# Altium PCB corePCB1nohighfreq.PcbDoc (part 3 of 3)
Units mil, origin at the board's own origin, x right, y up, seen from the top; angles counter-clockwise.
Board outline 3543.31 x 3543.31 mil, 4 copper layers (Top Layer, Layer 1, Layer 2, Bottom Layer), stack 23.756 mil thick; 90 components, 166 nets, 640 pads, 463 vias.
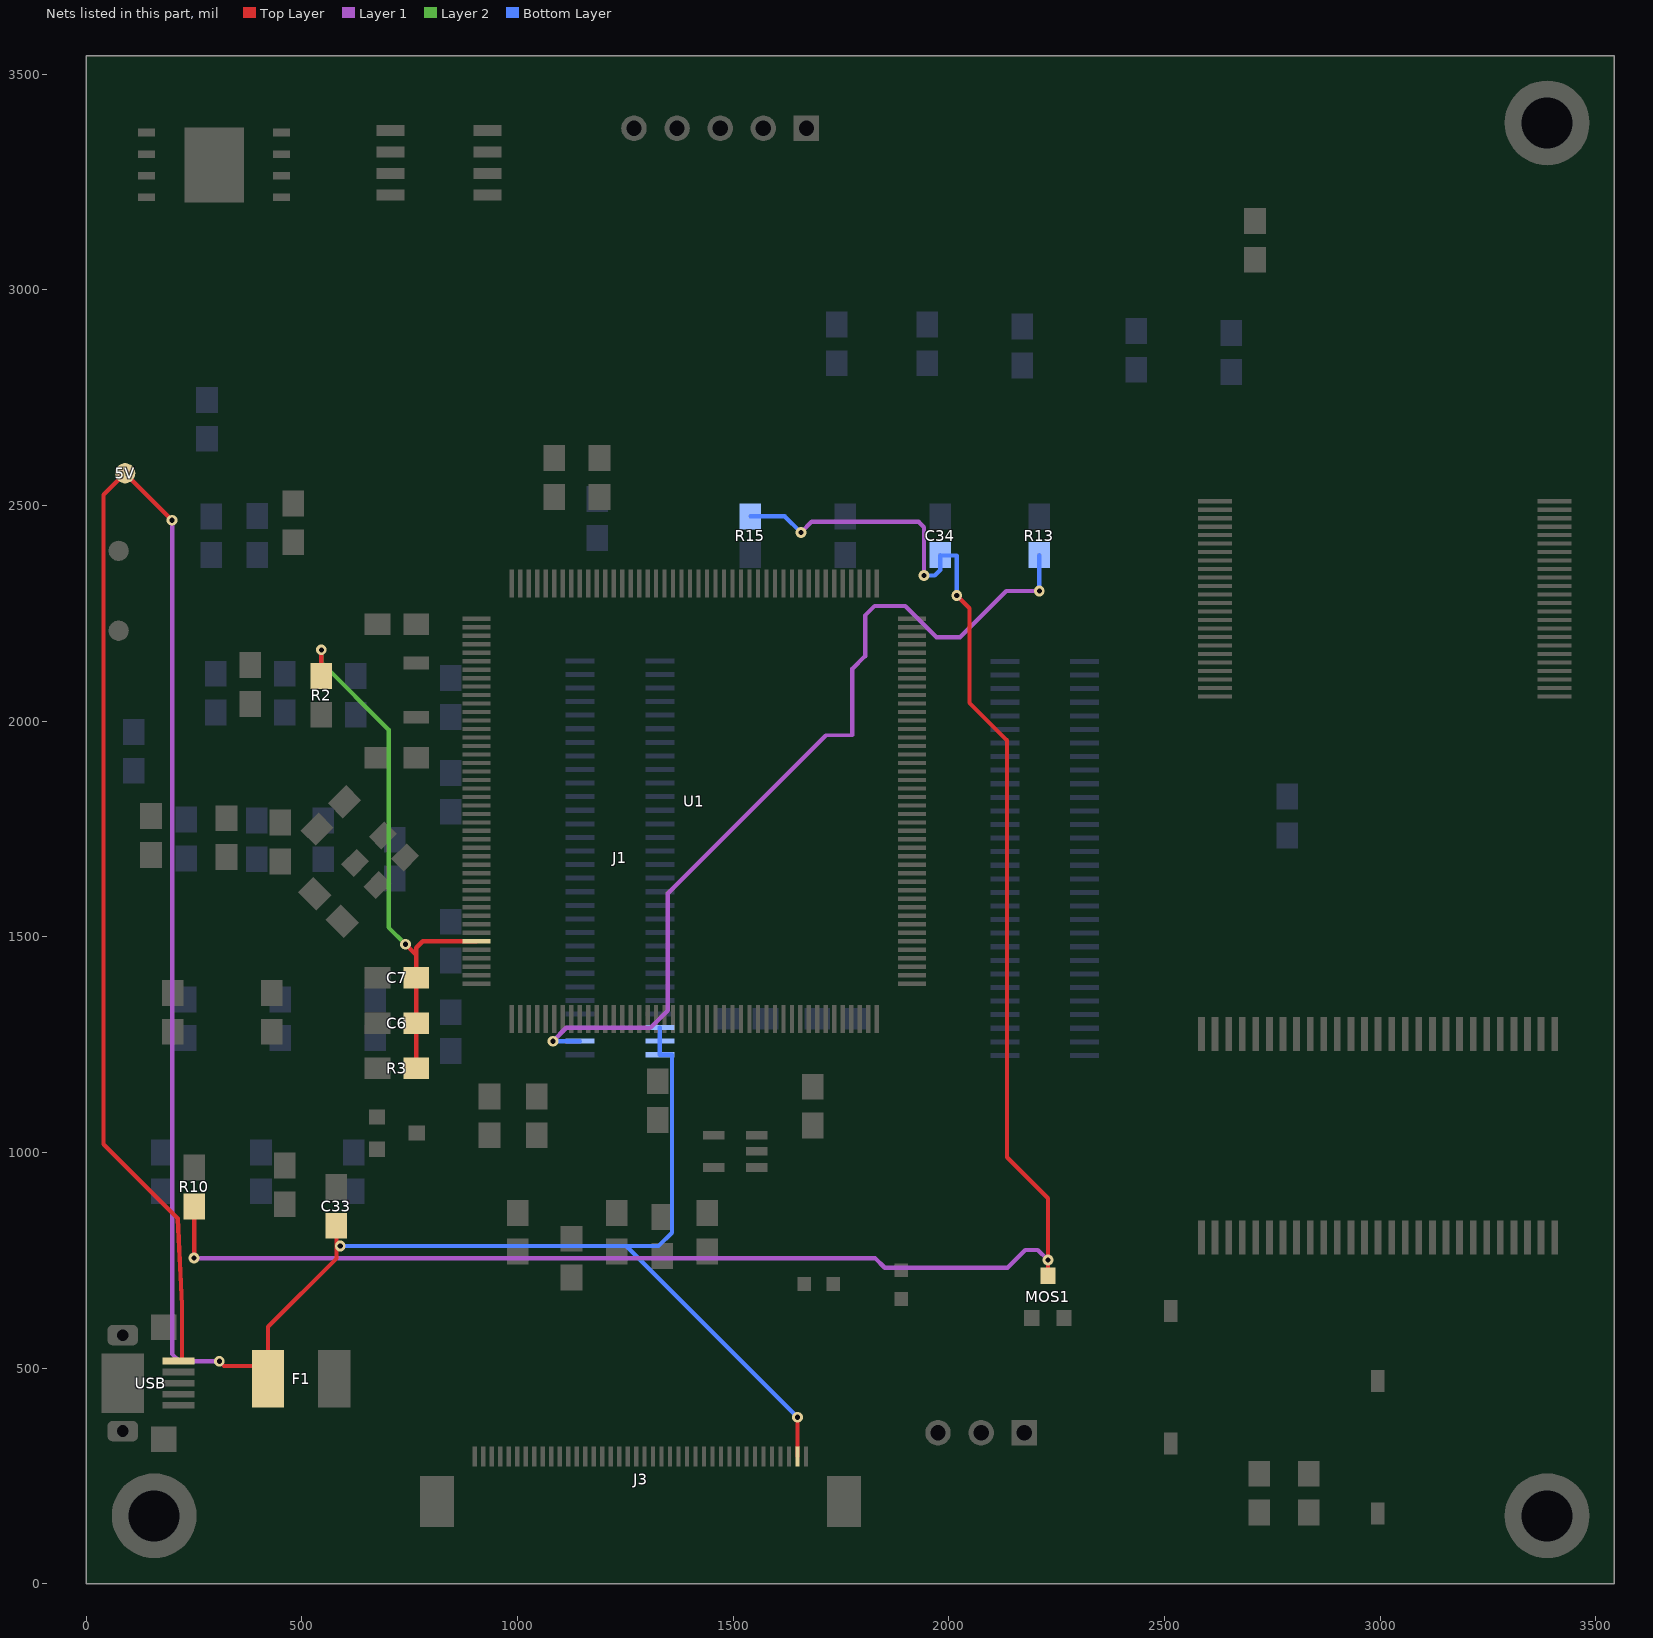
[diagram p5: the nets of this part, all layers, seen from the top]

## Via types
v1: diameter 25, hole 12, Top Layer to Bottom Layer, 463 vias

## Nets (pads, with @x,y where several pads share a name; then routed paths per layer and width w, separated by ;. In a path a pad name is that pad's centre, name@x,y a point inside that pad or via, vN(x,y) a via of type N, cw(c..) or ccw(c..) an arc to the next point about the centre after c; other vN are vias at no path point) (continued)
VCC5: 5V.1 C33.1 F1.1 J1.58 J1.59 J1.60 J3.2 USB.1 | length 6851.8
  Top Layer w10: v1(199,2466) 5V.1@90,2575 40,2525 40,1019 212,847 222,646 222,516.18 USB.1@214,516.18 ; v1(308.5,516) 319.5,505 F1.1@421.46,505 ; F1.1@421.46,475 F1.1@421.46,505 ; C33.1@580.06,830 580.06,791.99 ; v1(589.06,783) 580.06,791.99 ; J3.2@1649.02,295 v1(1649.02,385.98) ; F1.1@421.46,505 421.46,595.84 580.06,754.45 580.06,791.99
  Layer 1 w10: v1(199,2466) 199,532.5 215.5,516 v1(308.5,516)
  Bottom Layer w10: v1(589.06,783) 1252,783 ; J1.58@1330,1289.61 J1.59@1330,1258.11 J1.60@1330,1226.61 1358,1226.61 1358,814 1327,783 1252,783 ; v1(1649.02,385.98) 1252,783
VCC_LED: C34.1 MOS1.3 R10.1 R15.2 | length 4554.8
  Top Layer w10: v1(250,755) R10.1@250,875 ; v1(2018.56,2291.5) 2048,2262.06 2048,2042.5 2135,1955.5 2135,989 2230,894 v1(2230,750.41) MOS1.3@2230,714.21
  Layer 1 w10: v1(250,755) 1829,755 1851.5,732.5 2136.07,732.5 2177.5,773.93 2206.48,773.93 v1(2230,750.41) ; v1(1657,2437.5) 1682,2462.5 1930,2462.5 1942.5,2450 v1(1942.5,2338)
  Bottom Layer w10: R15.2@1540.06,2475 1619.5,2475 v1(1657,2437.5) ; v1(1942.5,2338) 1967.5,2338 1980.06,2350.56 C34.1@1980.06,2385 2018.56,2384 v1(2018.56,2291.5)
VDDA: C6.2 C7.2 R2.2 R3.1 U1.39 | length 1285.3
  Top Layer w10: R2.2@545.06,2105 v1(545.06,2165.5) ; v1(740,1483) 765,1458 ; R3.1@765,1195.06 C6.2@765,1299.94 C7.2@765,1404.94 765,1458 ; U1.39@905.3,1489.74 780,1489.74 765,1474.74 765,1458
  Layer 2 w10: v1(545.06,2165.5) 545.06,2135.94 701,1980 701,1522 v1(740,1483)
VREF+: J1.2 R13.1 | length 2069.9
  Layer 1 w10: v1(1082,1258) 1113,1289 1308,1289 1348.5,1329.5 1348.5,1600.67 1714.83,1967 1776.5,1968 1776.5,2121.5 1806,2151 1806,2245 1828,2267 1899,2267 1971.41,2194.59 2026,2194.59 2133.41,2302 v1(2210,2302)
  Bottom Layer w10: v1(1082,1258) 1082.11,1258.11 J1.2@1144.96,1258.11 ; v1(2210,2302) 2210.06,2302.06 R13.1@2210.06,2385
pads on no net: U3.40 U4.1 U4.2 U4.3 U4.4 U4.5 U4.6 U4.10 U4.11 U4.14 U4.15 U4.20 U4.21 U4.22 U4.23 U4.24 U4.25 U4.26 U4.27 U4.28 U4.33 U4.34 U4.35 U4.38 U4.39 U4.40 U4.45 U4.46 U4.47 U4.48 U6.9 USB.4

## Keep-outs
Keep-Out Layer:
  the board outline again, w10

## Text inside footprints (layer, text, board x,y; h text height)
J3: Top Overlay "40" at 924.7,358 h30 r180; Top Overlay "1" at 1672.7,354 h30 r180